# EAGLE board main (EAGLE 6.5.0)
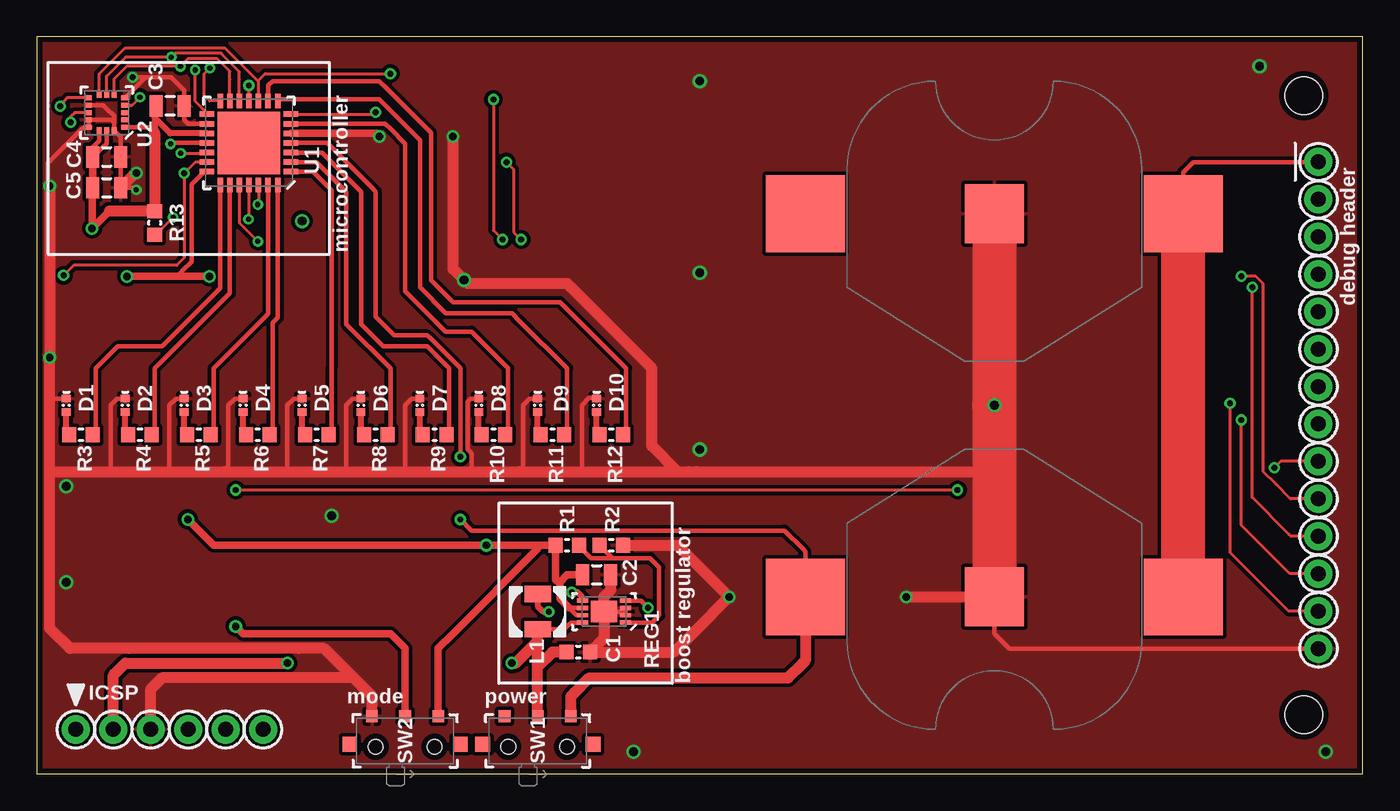
[diagram p0: board, top side]
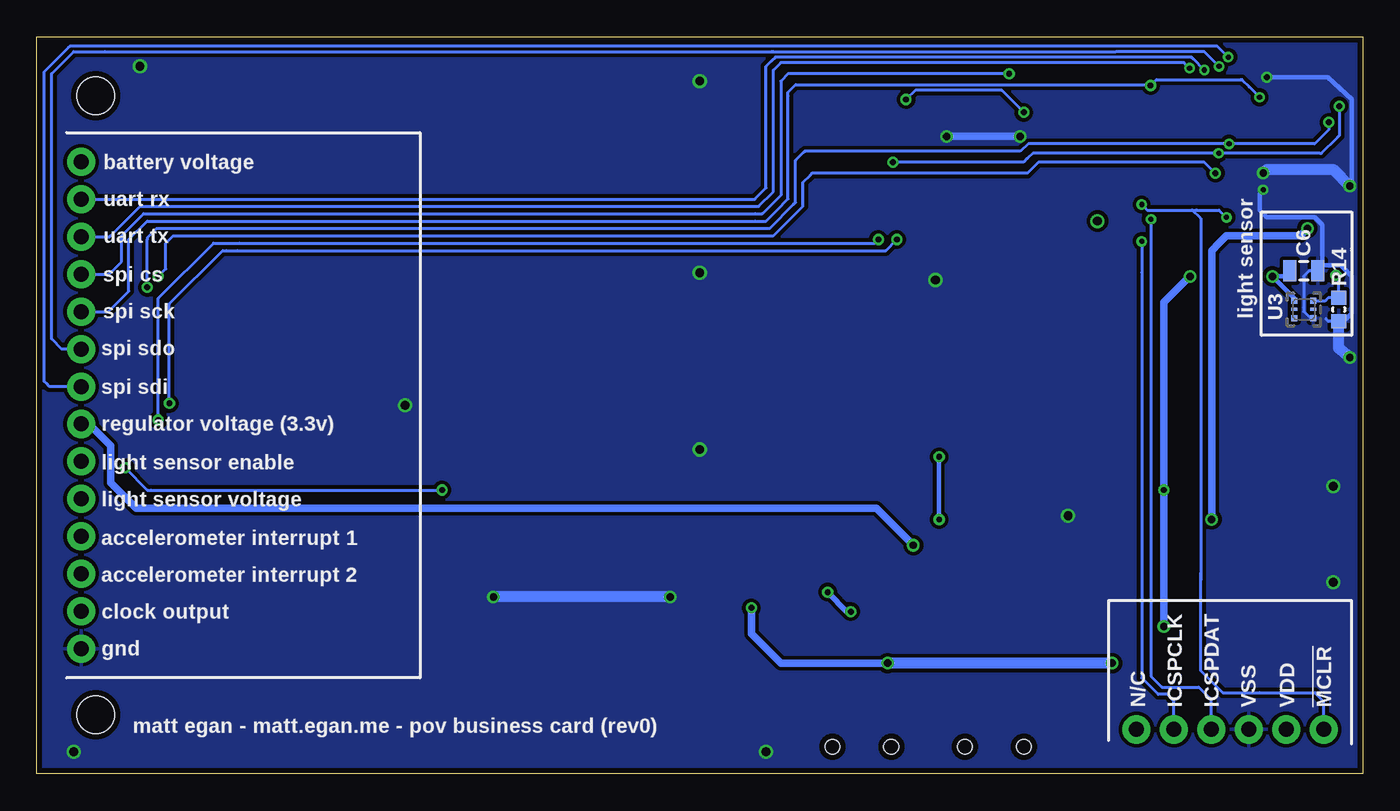
[diagram p1: board, bottom side, seen from below]

Size 90 x 50 mm. Coordinates in mm from the lower left corner, seen from the top.
Outline: 0,0 90,0 90,50 0,50 0,0
Copper layers (1*16): off 0.0356mm / dielectric 1.5011mm / Bottom 0.0356mm
Design rules "LaenPCBOrder *": minimum track width 6mil, minimum drill 13mil, track to track 6mil, track to pad 6mil, pad to pad 6mil, via to via 6mil, smd to smd 6mil, copper to edge 15mil, drill to drill 6mil, minimum pad ring 7mil, minimum via ring 7mil, stop-mask expansion 3mil, vias tented up to drill 5mm, thermal gap 10mil
Holes 2.54 mm at 86,4 86,46

## Footprints (pad centres in the part's own frame; a part is rotated, then mirrored left to right if it is on the bottom)
KEYSTONE-3002 = smd 5.35 x 5.2: P$+(1) -12.825,0; P$+(2) 12.825,0 | smd 4 x 4: P$- 0,0
SMD-0603 = smd 0.95 x 1: 1 -0.8,0; 2 0.8,0
SMD-0805 = smd 0.9 x 1.45: 1 -0.95,0; 2 0.95,0
SMD-0402-P = smd 0.5 x 0.6: + -0.45,0; - 0.45,0
1X6-0.1-ICSP = drill 1.016 pad 1.905: P$1 0,6.35; P$2 0,3.81; P$3 0,1.27; P$4 0,-1.27; P$5 0,-3.81; P$6 0,-6.35
1X14-0.1 = drill 1.016 pad 1.905: P$1 0,16.51; P$2 0,13.97; P$3 0,11.43; P$4 0,8.89; P$5 0,6.35; P$6 0,3.81; P$7 0,1.27; P$8 0,-1.27; P$9 0,-3.81; P$10 0,-6.35; P$11 0,-8.89; P$12 0,-11.43; P$13 0,-13.97; P$14 0,-16.51
VLF403210MT = smd 1.1 x 1.8: P$1 -1.2,0; P$2 1.2,0
DFN-8(2X3) = smd 0.3 x 0.75: 1 -0.75,-1.45; 2 -0.25,-1.45; 3 0.25,-1.45; 4 0.75,-1.45; 5 0.75,1.45; 6 0.25,1.45; 7 -0.25,1.45; 8 -0.75,1.45 | smd 1.45 x 1.75: EP 0,0
JS102000SAQN = smd 1 x 1: MOUNT$1 -3.75,0; MOUNT$2 3.75,0 | smd 0.8 x 0.8: SW$1 -2.25,1.9; SW$2 0,1.9; SW$3 2.25,1.9 | hole 1: 2,-0.18; -2,-0.18
QFN-28 = smd 1 x 0.37: P$1 -2.85,1.95; P$2 -2.85,1.3; P$3 -2.85,0.65; P$4 -2.85,0; P$5 -2.85,-0.65; P$6 -2.85,-1.3; P$7 -2.85,-1.95; P$15 2.85,-1.95; P$16 2.85,-1.3; P$17 2.85,-0.65; P$18 2.85,0; P$19 2.85,0.65; P$20 2.85,1.3; P$21 2.85,1.95 | smd 0.37 x 1: P$8 -1.95,-2.85; P$9 -1.3,-2.85; P$10 -0.65,-2.85; P$11 0,-2.85; P$12 0.65,-2.85; P$13 1.3,-2.85; P$14 1.95,-2.85; P$22 1.95,2.85; P$23 1.3,2.85; P$24 0.65,2.85; P$25 0,2.85; P$26 -0.65,2.85; P$27 -1.3,2.85; P$28 -1.95,2.85 | smd 4.25 x 4.25: P$29 0,0
LGA-16 = smd 0.45 x 0.34: P$1 -1.225,1; P$2 -1.225,0.5; P$3 -1.225,0; P$4 -1.225,-0.5; P$5 -1.225,-1; P$9 1.225,-1; P$10 1.225,-0.5; P$11 1.225,0; P$12 1.225,0.5; P$13 1.225,1 | smd 0.34 x 0.45: P$6 -0.5,-1.225; P$7 0,-1.225; P$8 0.5,-1.225; P$14 0.5,1.225; P$15 0,1.225; P$16 -0.5,1.225
AVAGO-CHIPLED6 = smd 0.4 x 0.4: P$1 0.6,0.65; P$3 -0.6,0.65; P$4 -0.6,-0.65; P$6 0.6,-0.65 | smd 0.2 x 0.4: P$2 0,0.65; P$5 0,-0.65

## Placement (x,y rotation side)
B1  BATTERYKEYSTONE-3002  [KEYSTONE-3002]  65,12 180 top
B2  BATTERYKEYSTONE-3002  [KEYSTONE-3002]  65,38 0 top
C1  4.7uF  [SMD-0603]  36.75,8.25 0 top
C2  10uF  [SMD-0805]  38,13.5 0 top
C3  0.1uF  [SMD-0805]  9.05,45.31 180 top
C4  0.1uF  [SMD-0805]  4.74,41.86 0 top
C5  10uF  [SMD-0805]  4.74,39.76 0 top
C6  0.1uF  [SMD-0805]  4,34.12 180 bottom
D1  LED0402  [SMD-0402-P]  2,25 90 top
D2  LED0402  [SMD-0402-P]  6,25 90 top
D3  LED0402  [SMD-0402-P]  10,25 90 top
D4  LED0402  [SMD-0402-P]  14,25 90 top
D5  LED0402  [SMD-0402-P]  18,25 90 top
D6  LED0402  [SMD-0402-P]  22,25 90 top
D7  LED0402  [SMD-0402-P]  26,25 90 top
D8  LED0402  [SMD-0402-P]  30,25 90 top
D9  LED0402  [SMD-0402-P]  34,25 90 top
D10  LED0402  [SMD-0402-P]  38,25 90 top
J1  ICSP-HEADER  [1X6-0.1-ICSP]  9,3 90 top
J2  HEADER-14  [1X14-0.1]  87,25 0 top
L1  4.7uH  [VLF403210MT]  34,11 90 top
R1  536k  [SMD-0603]  36,15.5 180 top
R2  309k  [SMD-0603]  39,15.5 180 top
R3  82  [SMD-0603]  3,23 180 top
R4  82  [SMD-0603]  7,23 180 top
R5  82  [SMD-0603]  11,23 180 top
R6  82  [SMD-0603]  15,23 180 top
R7  82  [SMD-0603]  19,23 180 top
R8  82  [SMD-0603]  23,23 180 top
R9  82  [SMD-0603]  27,23 180 top
R10  82  [SMD-0603]  31,23 180 top
R11  82  [SMD-0603]  35,23 180 top
R12  82  [SMD-0603]  39,23 180 top
R13  10K  [SMD-0603]  8,37.38 90 top
R14  10K  [SMD-0603]  1.62,31.5 90 bottom
REG1  MCP1640  [DFN-8(2X3)]  38.5,11 90 top
SW1  JS102000SAQN  [JS102000SAQN]  34,2 0 top
SW2  JS102000SAQN  [JS102000SAQN]  25,2 0 top
U1  PIC18F2XK20  [QFN-28]  14.4,42.8 180 top
U2  LIS3DSH  [LGA-16]  4.74,44.86 180 top
U3  APDS-9008  [AVAGO-CHIPLED6]  4,31.5 90 bottom

## Library data of the parts
B1 B2 C1-C6 D1-D10 J1 J2 L1 R1-R14 REG1 SW1 SW2 U1-U3 = matt

## Nets
+3V3: C2.1 C3.2 C4.1 C5.1 J2.P$8 R1.2 R13.2 REG1.6 REG1.7 SW2.SW$3 U1.P$17 U2.P$1 U2.P$14 U2.P$15
ACCEL_INT1: J2.P$11 U1.P$18 U2.P$11
ACCEL_INT2: J2.P$12 U1.P$19 U2.P$9
GND: B1.P$- B2.P$- C1.2 C2.2 C3.1 C4.2 C5.2 C6.1 D1.- D2.- D3.- D4.- D5.- D6.- D7.- D8.- D9.- D10.- J1.P$3 J2.P$14 R2.1 R14.1 REG1.2 REG1.3 REG1.EP SW2.SW$1 U1.P$5 U1.P$16 U2.P$5 U2.P$10 U2.P$12 U2.P$13 U2.P$16 U3.P$4
ICSP_!MCLR!: J1.P$1 R13.1 U1.P$26
ICSP_CLK: J1.P$5 U1.P$24
ICSP_DAT: J1.P$4 U1.P$25
LED1: R3.1 U1.P$22
LED2: R4.1 U1.P$23
LED3: R5.1 U1.P$27
LED4: R6.1 U1.P$28
LED5: R7.1 U1.P$1
LED6: R8.1 U1.P$2
LED7: R9.1 U1.P$3
LED8: R10.1 U1.P$6
LED9: R11.1 U1.P$8
LED10: R12.1 U1.P$9
LIGHT_EN: C6.2 J2.P$9 SW2.SW$2 U1.P$21 U3.P$1
LIGHT_VSENSE: J2.P$10 R14.2 U1.P$20 U3.P$6
N$3: L1.P$2 REG1.5
N$5: R1.1 R2.2 REG1.1
N$7: D1.+ R3.2
N$8: D2.+ R4.2
N$9: D3.+ R5.2
N$10: D4.+ R6.2
N$11: D5.+ R7.2
N$12: D6.+ R8.2
N$13: D7.+ R9.2
N$14: D8.+ R10.2
N$15: D9.+ R11.2
N$16: D10.+ R12.2
PIC_CLKOUT: J2.P$13 U1.P$7
PIC_CS: J2.P$4 U1.P$10 U2.P$8
PIC_RX: J2.P$2 U1.P$15
PIC_SCK: J2.P$5 U1.P$11 U2.P$4
PIC_SDI: J2.P$7 U1.P$12 U2.P$7
PIC_SDO: J2.P$6 U1.P$13 U2.P$6
PIC_TX: J2.P$3 U1.P$14
V_SW: C1.1 J1.P$2 L1.P$1 REG1.4 REG1.8 SW1.SW$2
VBATT: B1.P$+(1) B1.P$+(2) B2.P$+(1) B2.P$+(2) J2.P$1 SW1.SW$3 U1.P$4

## Tracks (layer width: path | path; a pad name or v marks a point on that pad's centre or on a via)
+3V3  (via drill 0.5 pad 0.18, 0.5 pad 0.2)
  off 0.3: C2.1 36.75,13.5 | REG1.7 36.62,10.75 36.12,11.25 REG1.6 | U2.P$15 4.74,42.76 4.44,42.46 3.94,41.96 | 3.94,41.96 C4.1 3.79,42.51 4.24,42.96 U2.P$14 | 3.94,41.96 3.79,41.81 | U2.P$1 7.38,43.86 7.61,43.86 7.64,43.86 8,43.5 | R1.2 34.25,15.5 34,15.25
  off 0.4: U1.P$17 9.05,43.45 8.75,43.75 8,44.5 | C3.2 8,45.21 8,44.5 | 8,44.5 8,43.5
  off 0.5: 36.75,13.5 36,13.5 35.5,13 35.5,12.88 | 3.79,41.81 C5.1 3.75,39.72 v3.75,37 4.92,38.17 | SW2.SW$3 27.25,8.5 28.25,9.5 34,15.25 | v10.25,17.25 12,15.5 v30.5,15.5 R1.2 35.2,13.55 35.2,13.18 35.5,12.88 | 36.12,11.25 35.5,11.88 35.5,12.88
  off 0.75: 8,43.5 R13.2 4.92,38.17
  Bottom 0.5: v30.5,15.5 33,18 44.25,18 78,18 83.25,18 85,19.75 85,22.25 86.48,23.73 J2.P$8 86.98,23.75 | v3.75,37 4.25,36.5 5.25,36.5 9.25,36.5 9.75,36 10.25,35.5 10.25,31.75 v10.25,17.25
ACCEL_INT1  (via drill 0.35 pad 0.18, 0.4 pad 0.18)
  off 0.2: U2.P$11 2.56,44.86 2.3,44.6 v2.3,44.2 | J2.P$11 85.89,16.11 85.64,16.11 85.14,16.11 85,16.25 82.5,18.75 82.5,19.25 v82.5,33
  off 0.3: U1.P$18 9.14,42.8 arc90 v9.07,42.74
  Bottom 0.2: v2.3,44.2 2.3,43.7 3.26,42.74 v9.07,42.74 22.7,42.74 23.25,42.25 31.5,42.25 37.88,42.25 38,42.12 38.5,41.62 38.5,38.75 38.62,38.62 40.25,37 76.62,37 80.5,37 81.88,37 82.5,36.38 82.5,36.25 v82.5,33
ACCEL_INT2  (via drill 0.35 pad 0.18, 0.4 pad 0.18)
  off 0.2: v9.78,42.1 11.5,42.1 U1.P$19 | U2.P$9 2.06,45.86 v1.6,45.3 | J2.P$12 85.06,13.57 83.62,15 81.75,16.88 v81.75,24 | v31.88,41.5 32.38,41 32.38,36.75 v32.88,36.25
  Bottom 0.2: v1.6,45.3 1.6,43.3 1.7,43.2 2.8,42.1 2.9,42.1 v9.78,42.1 22.4,42.1 22.75,41.75 23,41.5 31.5,41.5 v31.88,41.5 | v81.75,24 81.75,32.25 78,36 76.25,36 33.12,36 v32.88,36.25
GND  (via drill 0.35 pad 0.18, 0.4 pad 0.18, 0.5 pad 0.18, 0.6 pad 0.5)
  off 0.3: U2.P$16 5.69,43.18 C4.2 C5.2 6.62,39.76 v6.75,39.62 | U2.P$16 5.24,44.01 | 5.24,44.01 5.24,44.19 | 5.24,44.19 5.24,44.63 4.75,45.12 4.52,45.36 U2.P$10 | U2.P$16 5.24,44.01 | 5.24,44.19 5.07,44.36 U2.P$12 U2.P$13 3.17,43.86 2.25,42.94 0.75,41.44 0.75,40 | U2.P$5 5.98,45.86 7.38,47.25 | 7.38,47.25 9.12,47.25 10,46.38 C3.1 10,44.38 10.28,44.1 U1.P$16 | J2.P$14 66.01,8.49 65.25,9.25 65,9.5 B1.P$- | 7.73,5.73 7.75,5.75 | REG1.2 REG1.3 39.7,11 REG1.EP | D2.- 5.45,25.45 5,25 5,20.5 | D3.- 9.45,25.45 9,25 9,20.5 | D4.- 13.45,25.45 13,25 13,20.75 12.75,20.5 | D5.- 17.45,25.45 17,25 17,20.5 | D6.- 21.45,25.45 21,25 21,20.5 | D7.- 25.45,25.45 25,25 25,20.5 | D8.- 29.45,25.45 29.25,25.25 29.25,22 29.5,21.75 29.5,20.5 | D9.- 33.45,25.45 33,25 33,20.75 32.75,20.5 | D10.- 38,25.5 37.5,25.5 37,25 37,20.5 | D1.- 1.05,25.45 arc-90 0.88,25.5 | 7.38,47.25 v6.5,47.25 | 0.75,40 v0.88,39.88 0.75,40
  off 0.5: v23.25,43.25 23.05,43.45 U1.P$5
  off 0.75: C2.2 38.95,12.45 38.75,12.25 38.5,12 REG1.EP 38.5,9.2 C1.2 43.25,8.25 44.75,9.75 v47,12 43.5,15.5 R2.1 | SW2.SW$1 22.75,5.25 | 22.75,5.25 22.5,5.5 21.5,6.5 | 21.5,6.5 8.5,6.5 7.75,5.75 | J1.P$3 7.73,5.73 | v59,12 B1.P$- | 22.75,5.25 21.5,6.5 | 21.5,6.5 19.5,8.5 17.75,8.5 6.25,8.5 2.25,8.5 1,9.75 0.88,9.88 0.88,20.5 | 0.88,20.5 5,20.5 9,20.5 12.75,20.5 17,20.5 21,20.5 25,20.5 29.5,20.5 32.75,20.5 37,20.5 43.5,20.5 | 43.5,20.5 44.25,20.5 | 44.25,20.5 44.75,20.5 65,20.5 | 43.5,20.5 41.75,22.25 41.75,27.5 36.25,33 36,33.25 29.25,33.25 28.25,34.25 v28.25,43.25 | 43.5,20.5 44.25,20.5 | 0.88,20.5 0.88,25.5 v0.88,28.25 v0.88,39.88 | C5.2 6.68,40.75 v6.75,40.75
  off 3: B2.P$- v65,25 65,20.5 B1.P$-
  Bottom 0.2: C6.1 3.62,34.12 3.75,34 4,33.75 4,31.62 4,31.38 3.52,30.9 U3.P$4 | R14.1 2.33,30.7 2.5,30.88
  Bottom 0.3: v6.75,39.62 7,39.38 7,39.25 7,38.25 6.5,37.75 4,37.75 3.25,37.75 2.75,37.25 2.75,34.75 2.75,34.42 C6.1 2.67,34.5 1.5,34.5 0.75,33.75 0.75,31.25 1.3,30.7 R14.1 | v6.5,47.25 3.25,47.25 2.38,47.25 0.75,45.75 0.75,40 v0.88,39.88
  Bottom 0.5: v28.25,43.25 v23.25,43.25
  Bottom 0.75: v47,12 v59,12 | v0.88,28.25 1.62,28.88 R14.1 | v6.75,40.75 6.5,41 4,41 2,41 v0.88,39.88
  other vias: 29,33.5 2,19.5 2,13 45,22 45,34 45,47 83,48 87.5,1.5 40.5,1.5 20,17.5
  pour Bottom (isolate 0.25): 89.7,49.7 89.7,0.3 0.3,0.3 0.3,49.7
  pour off (isolate 0.25): 89.7,49.7 89.7,0.3 0.3,0.3 0.3,49.7
ICSP_!MCLR!  (via drill 0.35 pad 0.18)
  off 0.2: U1.P$26 15.05,38.67 v15,38.62 | v9.25,37.75 8.75,37.25 8.07,36.58 R13.1
  Bottom 0.2: v15,38.62 14.75,38.38 14.62,38.25 11.62,38.25 | J1.P$1 2.65,4.9 2.75,5 3.25,5.5 7,5.5 9.5,5.5 11,7 11,13.62 | 11.62,38.25 11.31,38.25 11.25,38.25 9.75,38.25 v9.25,37.75 | 11,13.62 11,37.69 11.56,38.25 11.62,38.25 | 11,13.62 11,13.12
ICSP_CLK  (via drill 0.35 pad 0.18)
  off 0.2: U1.P$24 13.75,37.38 v15,36.12
  Bottom 0.2: v15,36.12 15,34 15,6.5 13.88,5.38 13.25,5.38 12.88,5 12.81,4.93 J1.P$5
ICSP_DAT  (via drill 0.35 pad 0.18)
  off 0.2: U1.P$25 arc90 14.38,39.92 v14.38,37.62
  Bottom 0.2: v14.38,37.62 14.38,6.62 13.62,5.88 11.12,5.88 10.38,5.12 10.27,5.02 J1.P$4
LED1
  off 0.3: R3.1 4,23.2 4,27.5 5.5,29 8.5,29 12.45,32.95 U1.P$22
LED2
  off 0.3: R4.1 8,23.2 8,27.5 13.1,32.6 U1.P$23
LED3
  off 0.3: R5.1 12,23.2 12,27.5 15.7,31.2 U1.P$27
LED4
  off 0.3: R6.1 16,23.2 16,27.5 16,30.6 16.35,30.95 U1.P$28
LED5
  off 0.3: R7.1 20,23.2 20,27.5 20,39.6 18.75,40.85 U1.P$1
LED6
  off 0.3: R8.1 24,23.2 24,27.5 21,30.5 21,39.5 19,41.5 U1.P$2
LED7
  off 0.3: R9.1 28,23.2 28,27.5 26.5,29 23.5,29 22,30.5 22,39.5 19.35,42.15 U1.P$3
LED8
  off 0.3: R10.1 32,23.2 32,27.5 29.5,30 27.75,30 26.5,31.25 25,32.75 25,42.75 24,43.75 23.65,44.1 U1.P$6
LED9
  off 0.3: R11.1 36,23.2 36,27.5 32.75,30.75 32.25,31.25 27.75,31.25 26,33 26,43 23.25,45.75 16.45,45.75 U1.P$8
LED10
  off 0.3: R12.1 40,23.2 40,27.5 35.75,31.75 35.5,32 28.25,32 26.75,33.5 26.75,43.5 23.75,46.5 23.25,47 16,47 15.75,46.75 15.7,46.7 U1.P$9
LIGHT_EN  (via drill 0.4 pad 0.5, 0.5 pad 0.18)
  off 0.2: J2.P$9 84.44,21.19 v84,20.75 | v62.5,19.25 v13.5,19.25
  off 0.3: U1.P$21 11.35,40.85 10.5,40 10.5,34.75 9.88,34.12 9.75,34 9.5,33.75
  off 0.5: v6.12,33.75 9.5,33.75 v11.71,33.75 | SW2.SW$2 25,8.5 24,9.5 14,9.5 v13.5,10
  Bottom 0.2: v84,20.75 82.5,19.25 82.25,19.25 v62.5,19.25
  Bottom 0.3: C6.2 5.33,33.75 v6.12,33.75 4.65,32.27 U3.P$1
  Bottom 0.5: v13.5,10 13.5,13 v13.5,19.25 13.5,32 11.75,33.75 v11.71,33.75
LIGHT_VSENSE  (via drill 0.4 pad 0.18)
  off 0.2: U1.P$20 10.75,41.5 v10,40.75 10,35.12 10,35 9.5,34.5 2.5,34.5 v1.81,33.81 | J2.P$10 85.85,18.65 85.1,18.65 84.12,19.62 83.25,20.5 83.25,21.25 83.25,33.12 83.25,33.25 82.75,33.75 v81.75,33.75
  Bottom 0.2: U3.P$6 2.52,32.1 2.5,32.12 2.33,32.3 R14.2 1.62,33.62 v1.81,33.81 | v10,40.75 10.75,41.5 22,41.5 22.75,40.75 31.5,40.75 37.38,40.75 37.5,40.62 38,40.12 38,38.5 40,36.5 79.25,36.5 80.75,36.5 81.25,36 81.25,34.25 v81.75,33.75
N$3  (via drill 0.4 pad 0.18)
  off 0.3: REG1.5 37,11.8
  off 0.4: 37,11.8 37,12 36.69,12.31 v36.31,12.31 | L1.P$2 34,11.38 34.38,11 v34.75,11
  Bottom 0.4: v36.31,12.31 35,11 v34.75,11
N$5
  off 0.3: REG1.1 40.5,10.25 41.75,10.25 42.25,10.75 42.25,14 41.75,14.5 41.62,14.62 39.88,14.62 39.12,14.62 | 39.12,14.62 39.08,14.62 R2.2 | R1.1 36.8,15.45 37.62,14.62 39.12,14.62
N$7
  off 0.4: R3.2 arc-90 2,23.2 D1.+
N$8
  off 0.4: R4.2 arc-90 6,23.2 D2.+
N$9
  off 0.4: R5.2 arc-90 10,23.2 D3.+
N$10
  off 0.4: R6.2 arc-90 14,23.2 D4.+
N$11
  off 0.4: R7.2 arc-90 18,23.2 D5.+
N$12
  off 0.4: R8.2 arc-90 22,23.2 D6.+
N$13
  off 0.4: R9.2 arc-90 26,23.2 D7.+
N$14
  off 0.4: R10.2 arc-90 30,23.2 D8.+
N$15
  off 0.4: R11.2 arc-90 34,23.2 D9.+
N$16
  off 0.4: R12.2 arc-90 38,23.2 D10.+
N$21  (via drill 0.6 pad 0.5)
  other vias: 18,37.5
PIC_CLKOUT  (via drill 0.4 pad 0.18)
  off 0.2: U1.P$7 22.81,44.75 22.88,44.75 v23,44.88 | J2.P$13 84.97,11.03 84.5,11.5 81,15 81,18.12 v81,25.12 | v31,45.75 31,36.88 v31.62,36.25
  Bottom 0.2: v23,44.88 24.5,46.38 30.38,46.38 v31,45.75 | v81,25.12 81,31.88 77.38,35.5 77.12,35.5 76.38,35.5 32.38,35.5 v31.62,36.25
PIC_CS  (via drill 0.4 pad 0.18)
  off 0.2: U2.P$8 4.24,47.49 6,49.25 12.75,49.25 15.05,46.95 U1.P$10 15.05,47.05 15.25,47.25 15.5,47.5 v24,47.5
  Bottom 0.2: J2.P$4 85.11,33.89 85,34 84.25,34.75 84.25,36.5 82.75,38 41.25,38 40.75,38 39.5,39.25 39.5,47 39,47.5 v24,47.5
PIC_RX  (via drill 0.35 pad 0.18)
  off 0.2: U1.P$15 11.55,44.83 10.75,45.62 10.75,47.5 v10.75,47.75
  Bottom 0.2: v10.75,47.75 11.5,48.5 11.62,48.62 13.5,48.62 23.25,48.62 39.88,48.62 40.12,48.38 40.5,48 40.5,39.75 41.25,39 41.28,38.97 J2.P$2
PIC_SCK  (via drill 0.35 pad 0.18, 0.4 pad 0.18)
  off 0.2: U1.P$11 v14.4,46.7 | U2.P$4 6.46,45.36 v7,45.9
  Bottom 0.2: v7,45.9 7.7,46.6 8.2,47.1 8.3,47.1 14,47.1 v14.4,46.7 14.45,46.75 38.5,46.75 39,46.25 39,46 39,39 39.75,38.25 40.5,37.5 41.25,37.5 82.5,37.5 83.75,36.25 83.75,32.75 85,31.5 85.15,31.35 J2.P$5
PIC_SDI  (via drill 0.35 pad 0.18)
  off 0.2: U2.P$7 4.74,47.34 6.03,48.62 v9.12,48.62 9.38,48.88 12.5,48.88 12.62,48.75 13.75,47.62 13.75,47.15 U1.P$12
  Bottom 0.2: v9.12,48.62 9.88,49.38 16.5,49.38 | J2.P$7 89.14,26.27 89.38,26.5 89.5,26.62 89.5,47.62 88,49.12 87.88,49.25 87.75,49.38 16.62,49.38 | 16.5,49.38 16.62,49.38 | 16.5,49.38 16.62,49.38
PIC_SDO  (via drill 0.35 pad 0.18)
  off 0.2: U2.P$6 5.24,47.14 6.1,48 8,48 v9.75,48 10.25,48.5 12.25,48.5 13.1,47.65 13.1,47.1 U1.P$13
  Bottom 0.2: v9.75,48 10.75,49 16.75,49 40,49 40.12,49 85.38,49 87.5,49 89,47.5 89,29.5 88.31,28.81 J2.P$6
PIC_TX  (via drill 0.35 pad 0.18)
  off 0.2: U1.P$14 11.72,45.65 11.38,46 11.38,47.5 v11.75,47.88
  Bottom 0.2: v11.75,47.88 12.12,48.25 13.5,48.25 23.25,48.25 39.5,48.25 40,47.75 40,39.5 41,38.5 41.25,38.5 82.25,38.5 83,38.5 83.25,38.25 85,36.5 85.07,36.43 J2.P$3
V_SW  (via drill 0.4 pad 0.18, 0.5 pad 0.18)
  off 0.2: REG1.4 40,11.8 REG1.4
  off 0.3: REG1.8 36.25,10.25 36,10 35.8,9.8 L1.P$1 | REG1.4 41,11.75 v41.5,11.25
  off 0.75: SW1.SW$2 34,5.25 34,7.25 | 34,7.25 34,9 | 34,9 L1.P$1 | C1.1 35,8.25 34,7.25 | J1.P$2 5.19,6.69 5.25,6.75 6,7.5 v17,7.5 | v32.25,7.5 32.5,7.5 34,9
  Bottom 0.3: 39.5,7.5 39.88,7.88
  Bottom 0.5: v41.5,11.25 41.5,9.5 39.88,7.88 39.5,7.5 v32.25,7.5
  Bottom 0.75: v17,7.5 v32.25,7.5
VBATT  (via drill 0.4 pad 0.18)
  off 0.3: U1.P$4 19.7,42.8 22.75,39.75 23,39.5 23,31 24.25,29.75 26.5,29.75 26.75,29.5 28.75,27.5 v28.75,21.5 | v28.75,17.25 29.5,16.5 50.75,16.5 52,15.25 52.17,15.07 B1.P$+(2) | B2.P$+(2) 77.83,40.83 78.5,41.5 J2.P$1
  off 0.75: SW1.SW$3 36.25,5.25 36.5,5.5 37.5,6.5 51,6.5 52,7.5 52.17,7.67 B1.P$+(2)
  off 3: B1.P$+(1) B2.P$+(2)
  Bottom 0.3: v28.75,17.25 v28.75,21.5

## Text on the board
tPlace: microcontroller | debug header | mode | power | boost regulator | ICSP
bPlace: battery voltage | light sensor | uart rx | uart tx | spi cs | spi sck | spi sdo | spi sdi | regulator voltage (3.3v) | light sensor enable | light sensor voltage | accelerometer interrupt 1 | accelerometer interrupt 2 | clock output | gnd | !MCLR! | VDD | VSS | ICSPDAT | ICSPCLK | N/C | matt egan - matt.egan.me - pov business card (rev0)